# Altium PCB MB.PcbDoc
Units mil, origin at the board's own origin, x right, y up, seen from the top; angles counter-clockwise.
Board outline 4133.86 x 4881.89 mil, 4 copper layers (Digital Layer, nMO Layer, MO Layer, GND Layer), stack 39.843 mil thick; 59 components, 77 nets, 349 pads, 0 vias.
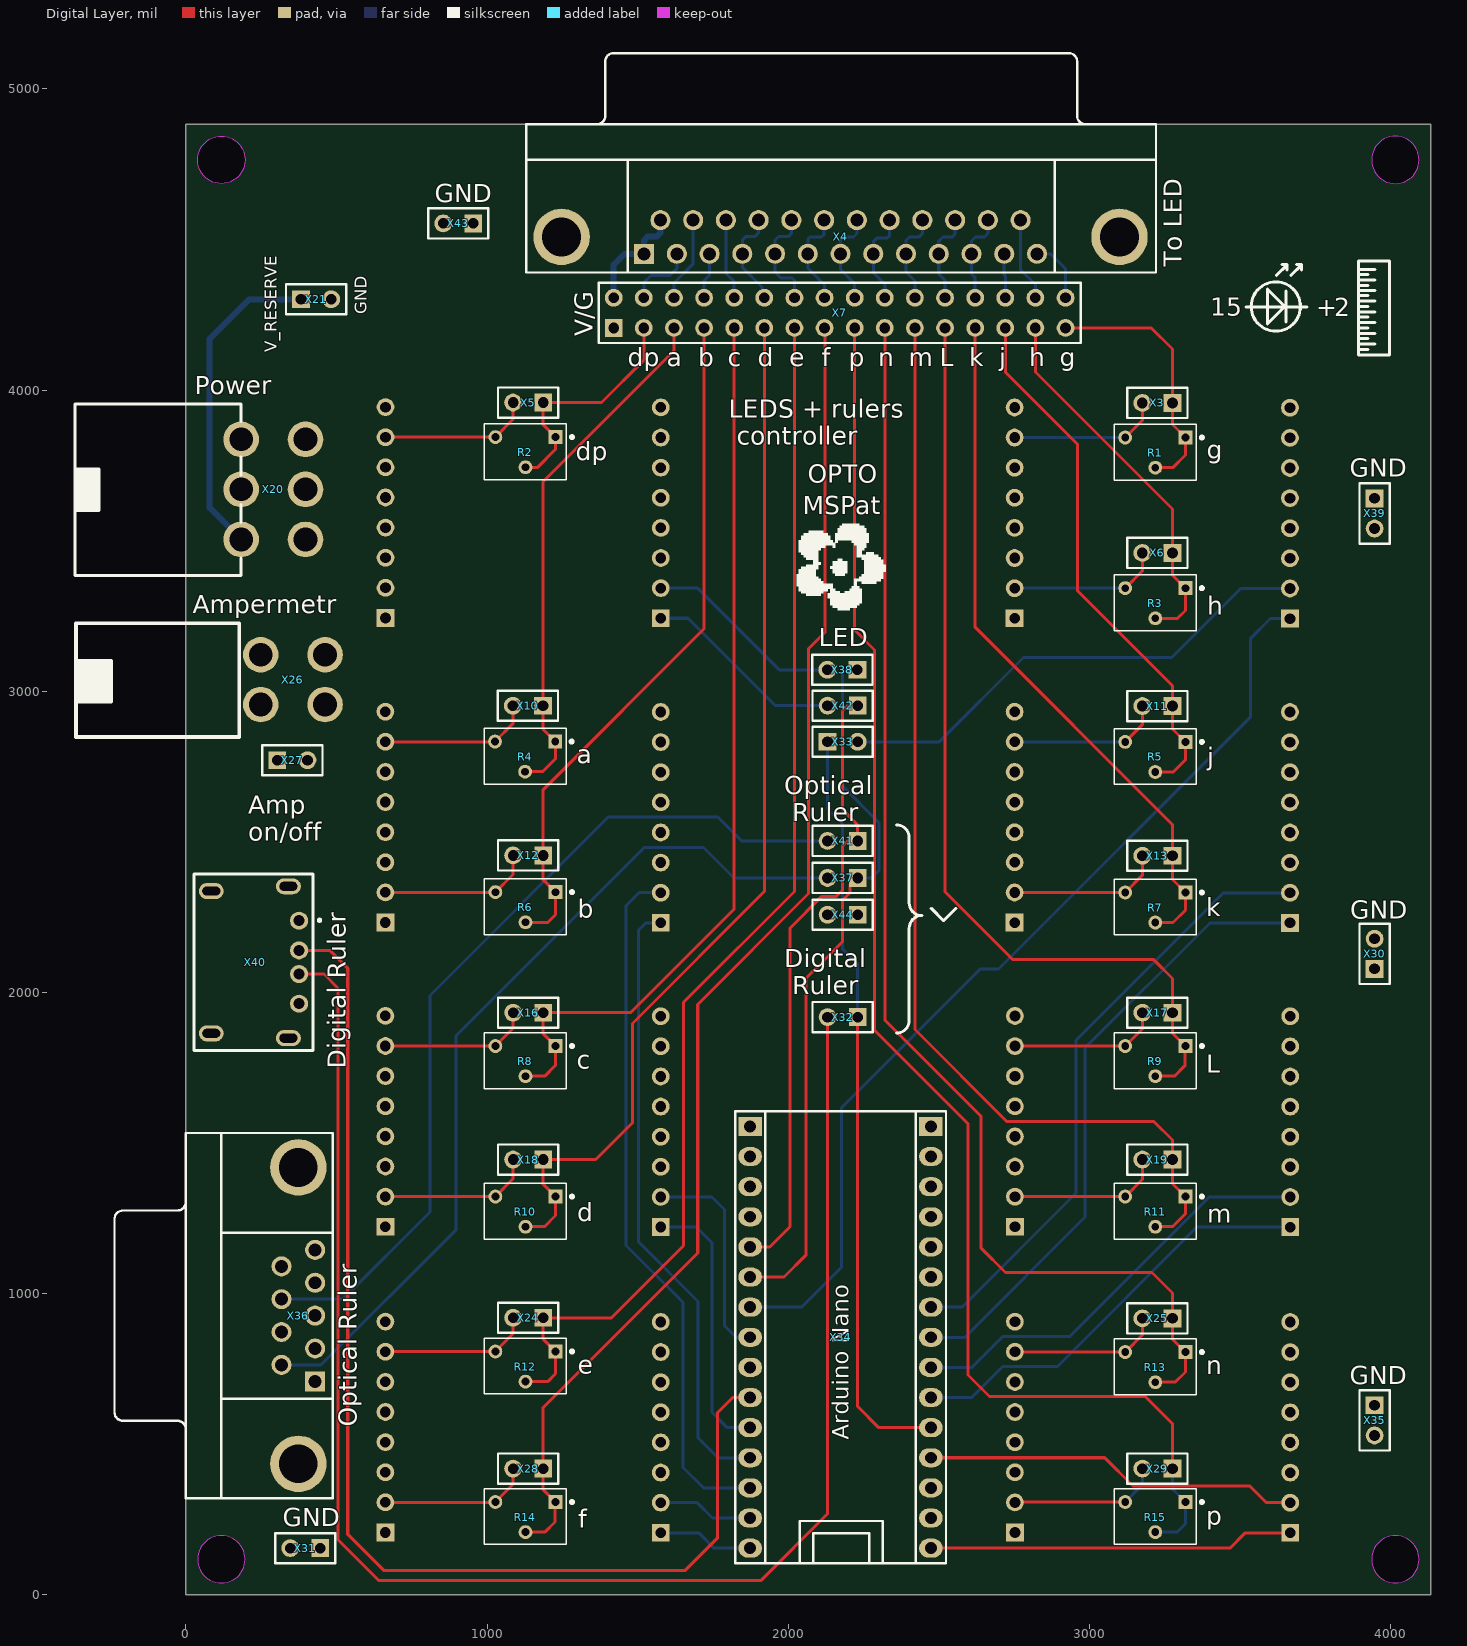
[diagram p0: Digital Layer view]
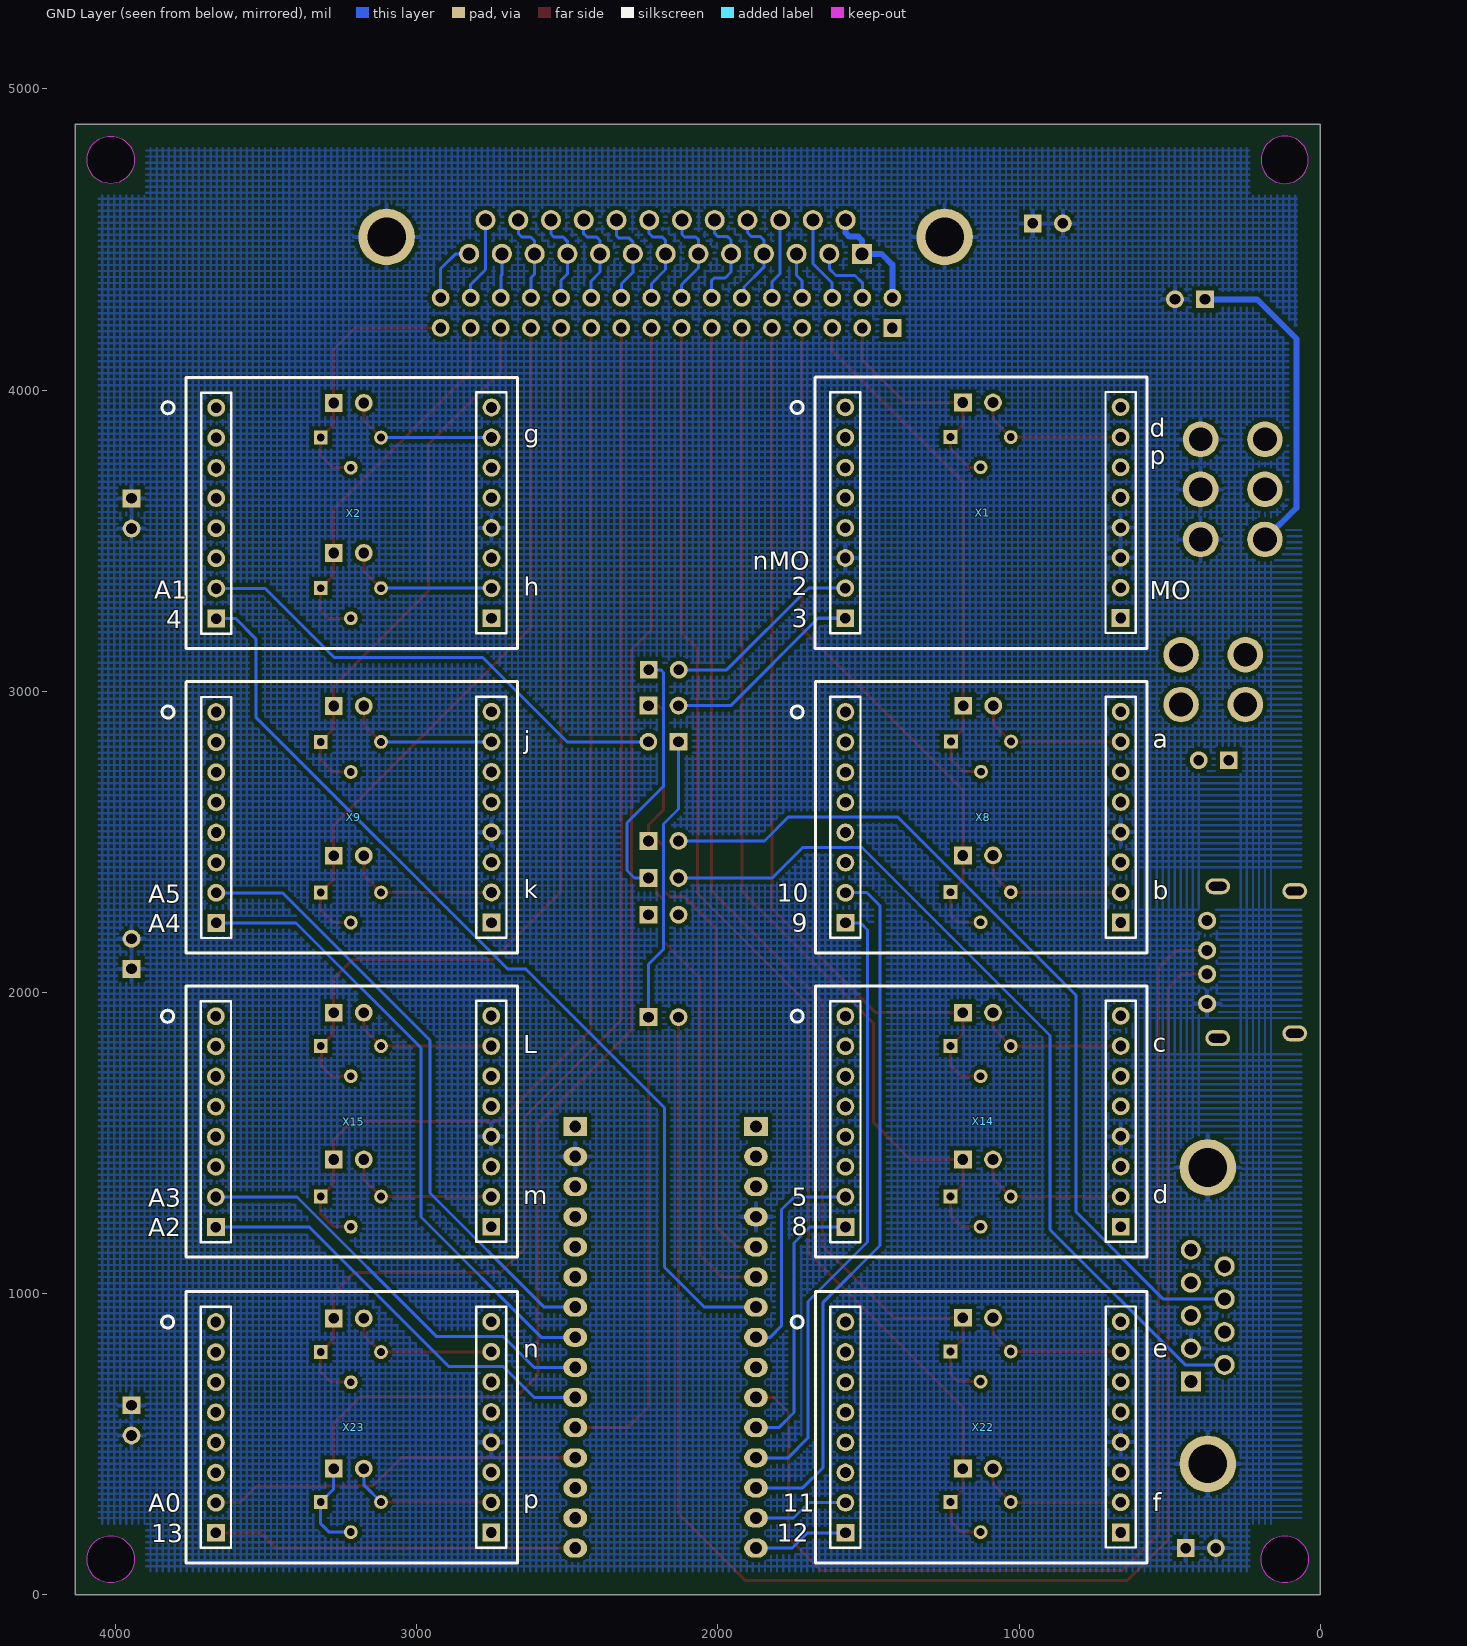
[diagram p1: GND Layer view, seen from below]
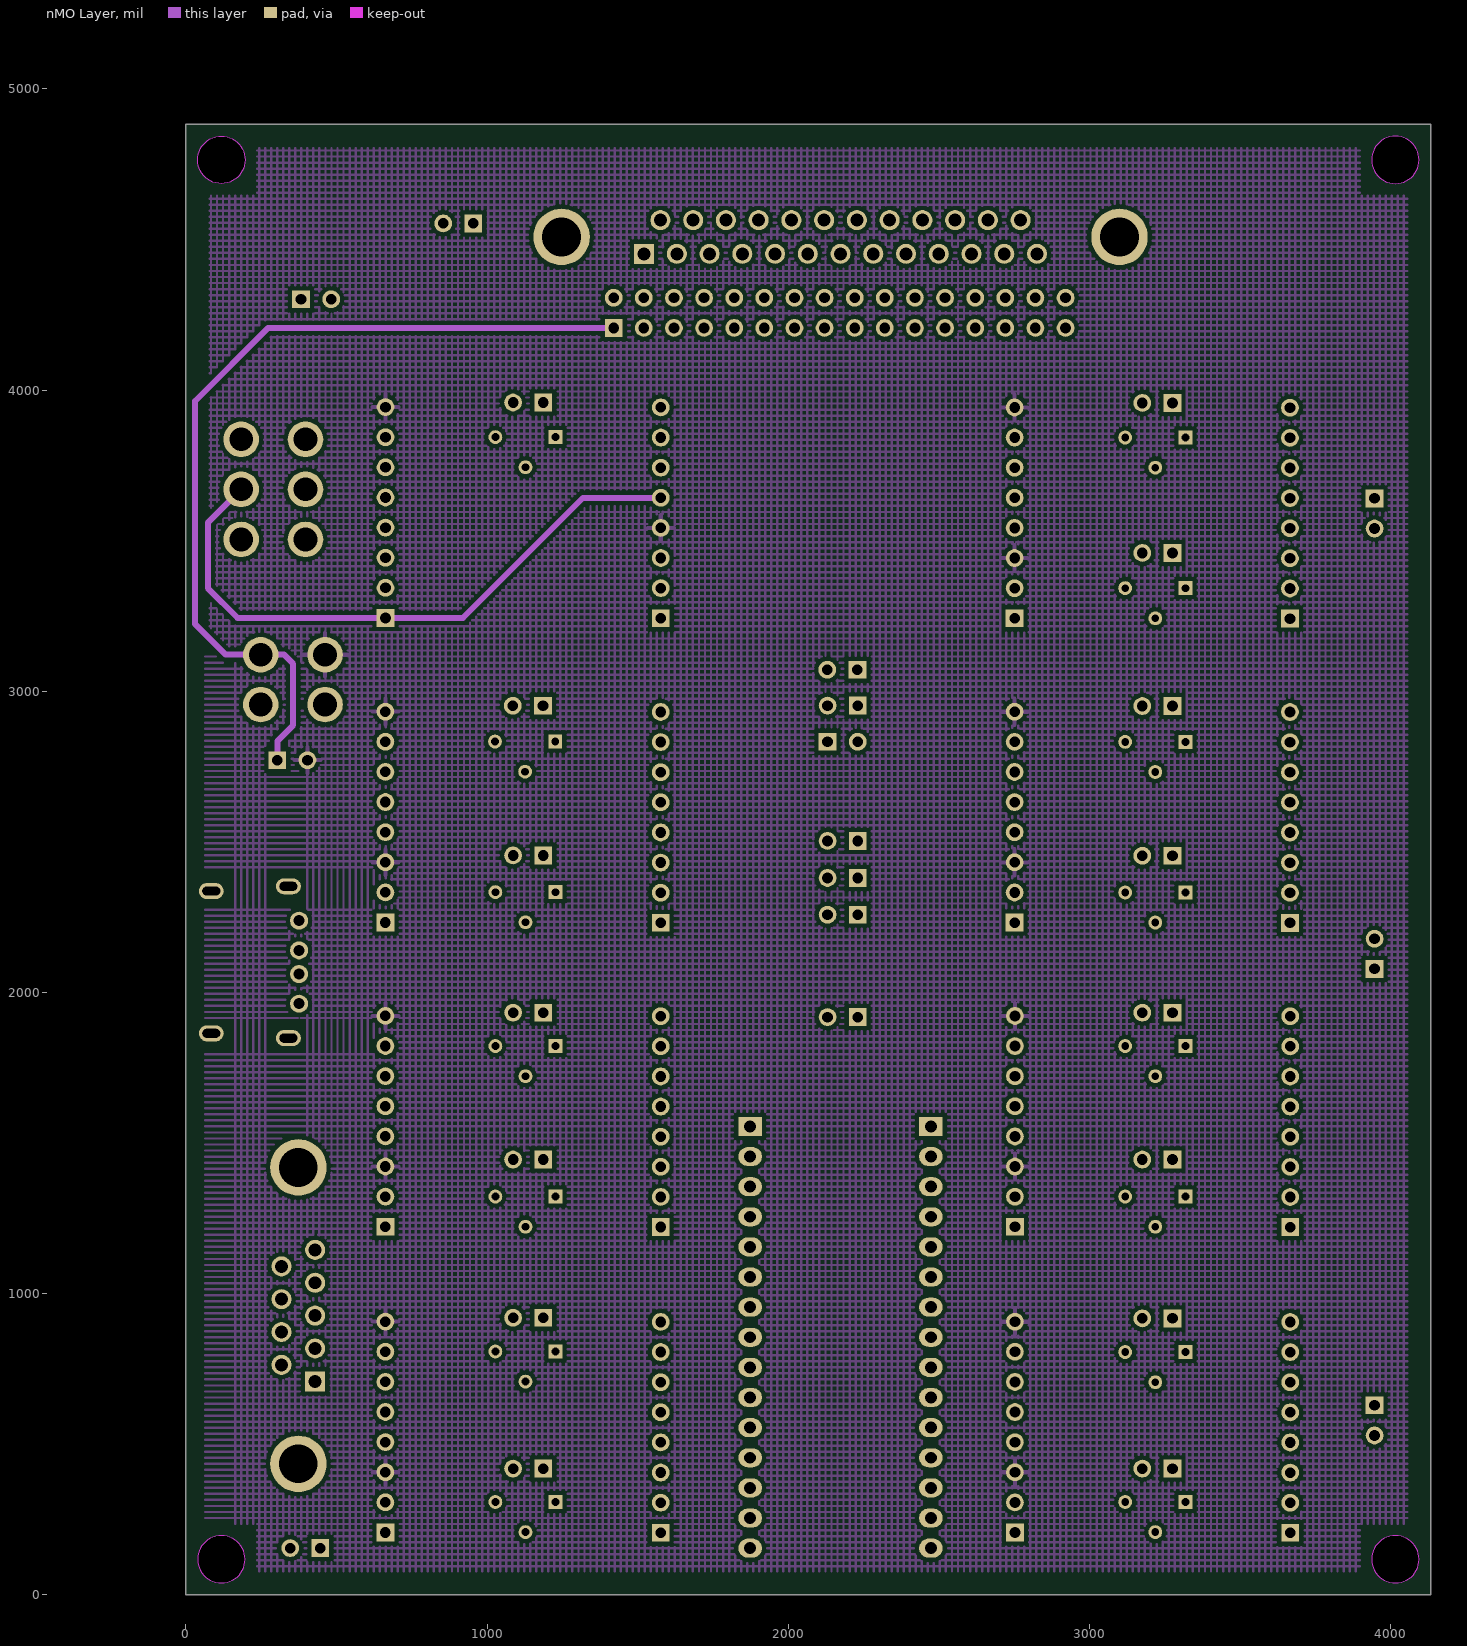
[diagram p2: nMO Layer]
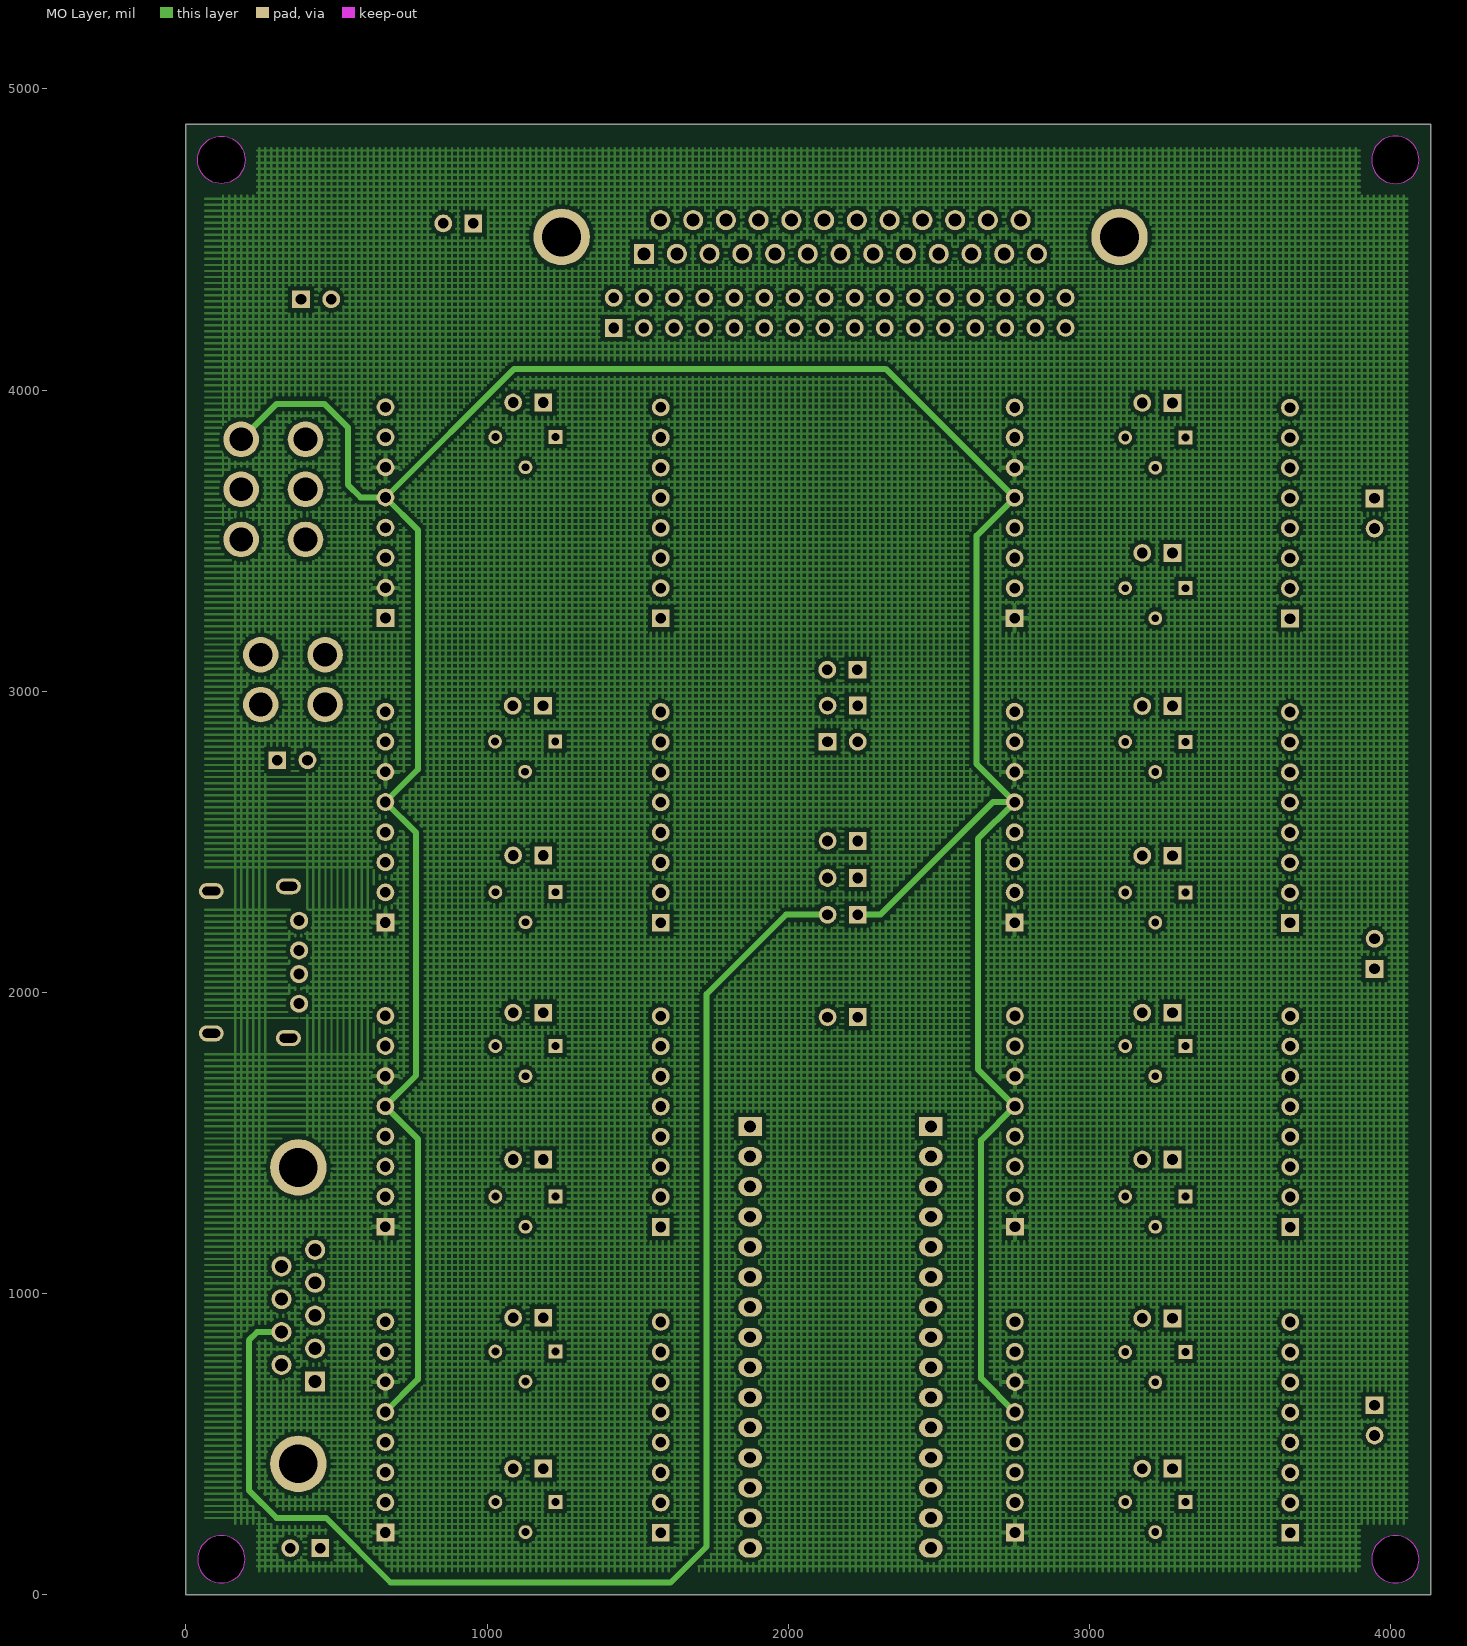
[diagram p3: MO Layer]

## Layer stack, top to bottom
Top Solder: solder mask 1, SM-001, Dk 4
Digital Layer: signal copper 0.7087
Dielectric 1: prepreg 4.5276, FR4 PR, Dk 4.2
nMO Layer: signal copper 0.7087
Dielectric 2: core 27.9528, FR4 Tg150, Dk 4.6
MO Layer: signal copper 0.7087
Dielectric 3: prepreg 4.5276, FR4 PR, Dk 4.2
GND Layer: signal copper 0.7087
Bottom Solder: solder mask 1, SM-001, Dk 4

## Board outline
0,4881.89 4133.86,4881.89 4133.86,0 0,0
cut-out: 3937.01,118.11 ccw(c4015.75,118.11) 4015.75,39.37 ccw(c4015.75,118.11) 4094.49,118.11 ccw(c4015.75,118.11) 4015.75,196.85 ccw(c4015.75,118.11)
cut-out: 3937.01,4763.78 ccw(c4015.75,4763.78) 4015.75,4685.04 ccw(c4015.75,4763.78) 4094.49,4763.78 ccw(c4015.75,4763.78) 4015.75,4842.52 ccw(c4015.75,4763.78)
cut-out: 118.11,4685.04 cw(c118.11,4763.78) 39.37,4763.78 cw(c118.11,4763.78) 118.11,4842.52 cw(c118.11,4763.78) 196.85,4763.78 cw(c118.11,4763.78)
cut-out: 39.37,118.11 ccw(c118.11,118.11) 118.11,39.37 ccw(c118.11,118.11) 196.85,118.11 ccw(c118.11,118.11) 118.11,196.85 ccw(c118.11,118.11)

## Design rules (kind name [scope] priority, off if disabled: settings)
AcuteAngle [All] p1: minimum=3.50000000000000E+0001 checktracksonly=FALSE
BoardOutlineClearance "BoardOutlineClearance 1" [All] p1: gap=9.84 ignorepadtopadclearanceinfootprint=FALSE except(0: Arc-SplitContinuation Track-SplitContinuation SMDPad-SplitContinuation THPad-SplitContinuation Via-SplitContinuation Fill-SplitContinuation Poly-SplitContinuation Region-SplitContinuation Text-SplitContinuation) // Milling
BoardOutlineClearance "BoardOutlineClearance 2" [All] p2: gap=15.75 ignorepadtopadclearanceinfootprint=FALSE except(0: Arc-SplitContinuation Track-SplitContinuation SMDPad-SplitContinuation THPad-SplitContinuation Via-SplitContinuation Fill-SplitContinuation Poly-SplitContinuation Region-SplitContinuation Text-SplitContinuation) // V-Cut
Clearance "Clearance 3 Oz" [All] p1: gap=13.78 ignorepadtopadclearanceinfootprint=FALSE except(9.84: Arc-Hole Track-Hole SMDPad-Hole THPad-Hole Via-Hole Fill-Hole Poly-Hole Region-Hole Text-Hole)
Clearance "Clearance 2 Oz" [All] p2: gap=11.81 ignorepadtopadclearanceinfootprint=FALSE except(9.84: Arc-Hole Track-Hole SMDPad-Hole THPad-Hole Via-Hole Fill-Hole Poly-Hole Region-Hole Text-Hole)
Clearance "Clearance-1 1 Oz" [All] p3: gap=7.87 ignorepadtopadclearanceinfootprint=FALSE except(9.84: Arc-Hole Track-Hole SMDPad-Hole THPad-Hole Via-Hole Fill-Hole Poly-Hole Region-Hole Text-Hole) // Standart
Clearance "Clearance-2 1 Oz" [All] p4: gap=5.91 ignorepadtopadclearanceinfootprint=FALSE except(7.87: Arc-Fill Arc-Poly Track-Fill Track-Poly SMDPad-Fill SMDPad-Poly THPad-Fill THPad-Poly Via-Fill Via-Poly Fill-Fill Fill-Poly Poly-Poly; 9.84: Arc-Hole Track-Hole SMDPad-Hole THPad-Hole Via-Hole Fill-Hole Poly-Hole Region-Hole Text-Hole) // Advance
Clearance "Clearance-1 1/2 Oz" [All] p5: gap=4.92 ignorepadtopadclearanceinfootprint=FALSE except(7.87: Arc-Fill Arc-Poly Track-Fill Track-Poly SMDPad-SMDPad SMDPad-Fill SMDPad-Poly THPad-Fill THPad-Poly Via-Fill Via-Poly Fill-Fill Fill-Poly Poly-Poly Poly-Region Poly-Text; 9.84: Arc-Hole Track-Hole SMDPad-Hole THPad-Hole Via-Hole Fill-Hole Poly-Hole Region-Hole Text-Hole) // Standart
Clearance "Clearance-2 1/2 Oz" [All] p6: gap=3.94 ignorepadtopadclearanceinfootprint=FALSE except(5.91: Arc-Fill Arc-Poly Track-Fill Track-Poly SMDPad-SMDPad SMDPad-Fill SMDPad-Poly THPad-Fill THPad-Poly Via-Fill Via-Poly Fill-Fill Fill-Poly Poly-Poly Poly-Region Poly-Text; 9.84: Arc-Hole Track-Hole SMDPad-Hole THPad-Hole Via-Hole Fill-Hole Poly-Hole Region-Hole Text-Hole) // Advance
DiffPairsRouting "DiffPairsRouting 1 Oz" [All] p1: maxlimit=10 minlimit=7.87 mostfreqgap=10 toplayer_minwidth=7.87 toplayer_maxwidth=15 toplayer_prefwidth=15 midlayer1_minwidth=7.87 midlayer1_maxwidth=15 midlayer1_prefwidth=15 midlayer2_minwidth=7.87 midlayer2_maxwidth=15 midlayer2_prefwidth=15 bottomlayer_minwidth=7.87 bottomlayer_maxwidth=15 bottomlayer_prefwidth=15 maxuncoupledlength=500
DiffPairsRouting "DiffPairsRouting 1/2 Oz" [All] p2: maxlimit=10 minlimit=3.94 mostfreqgap=10 toplayer_minwidth=3.94 toplayer_maxwidth=15 toplayer_prefwidth=15 midlayer1_minwidth=3.94 midlayer1_maxwidth=15 midlayer1_prefwidth=15 midlayer2_minwidth=3.94 midlayer2_maxwidth=15 midlayer2_prefwidth=15 bottomlayer_minwidth=3.94 bottomlayer_maxwidth=15 bottomlayer_prefwidth=15 maxuncoupledlength=500
HoleSize "Minimum HoleSize" [IsPad] p1: absolutevalues=TRUE maxlimit=232.28 minlimit=23.62 maxpercent=80.000 minpercent=20.000
HoleSize "Minimum HoleSize VIA 1" [IsVia] p2: absolutevalues=TRUE maxlimit=232.28 minlimit=11.81 maxpercent=80.000 minpercent=20.000 // Standart
HoleSize "Minimum HoleSize VIA 2" [IsVia] p3: absolutevalues=TRUE maxlimit=232.28 minlimit=7.87 maxpercent=80.000 minpercent=20.000 // Advance
HoleToHoleClearance Hole2HoleClearance [All] p1: gap=9.84 allowstackedmicrovias=FALSE
MinimumAnnularRing "Minimum AR VIA Standart" [IsVia] p1: minimumring=5.91
MinimumAnnularRing "Minimum AR PAD Standart" [IsPAD] p2: minimumring=7.87
MinimumAnnularRing "Minimum AR VIA Advance" [IsVia] p3: minimumring=3.94
MinimumAnnularRing "Minimum AR PAD Advance" [IsPAD] p4: minimumring=5.91
MinimumSolderMaskSliver "SolderMask Bridge Standart" [All] p1: minsoldermaskwidth=5.91 // All Masks
MinimumSolderMaskSliver "SolderMask Bridge Advance" [All] p2: minsoldermaskwidth=3.94 // Mask LDI
PlaneClearance "PlaneClearance 3 Oz" [All] p1: clearance=13.78
PlaneClearance "PlaneClearance 2 Oz" [All] p2: clearance=11.81
PlaneClearance "PlaneClearance 1 Oz" [All] p3: clearance=7.87
PlaneClearance "PlaneClearance-1 1/2 Oz" [All] p4: clearance=7.87 // Standart
PlaneClearance "PlaneClearance-2 1/2 Oz" [All] p5: clearance=5.91 // Advance
PlaneConnect "TermalConnect 3 Oz" [All] p1: planeconnectstyle=Relief reliefexpansion=7.87 reliefentries=4 reliefconductorwidth=13.78 reliefairgap=13.78 // Standart
PlaneConnect "TermalConnect 2 Oz" [All] p2: planeconnectstyle=Relief reliefexpansion=7.87 reliefentries=4 reliefconductorwidth=11.81 reliefairgap=11.81 // Standart
PlaneConnect "TermalConnect-1 1 Oz" [All] p3: planeconnectstyle=Relief reliefexpansion=7.87 reliefentries=4 reliefconductorwidth=7.87 reliefairgap=7.87 // Standart
PlaneConnect "TermalConnect-2 1 Oz" [All] p4: pad.planeconnectstyle=Relief pad.reliefexpansion=5.91 pad.reliefentries=4 pad.reliefconductorwidth=7.87 pad.reliefairgap=7.87 via.planeconnectstyle=Direct via.reliefexpansion=5.91 via.reliefentries=4 via.reliefconductorwidth=5.91 via.reliefairgap=5.91 // Advance
PlaneConnect "TermalConnect-1 1/2 Oz" [All] p5: planeconnectstyle=Relief reliefexpansion=7.87 reliefentries=4 reliefconductorwidth=7.87 reliefairgap=7.87 // Standart
PlaneConnect "TermalConnect-2 1/2 Oz" [All] p6: pad.planeconnectstyle=Relief pad.reliefexpansion=5.91 pad.reliefentries=4 pad.reliefconductorwidth=5.91 pad.reliefairgap=5.91 via.planeconnectstyle=Direct via.reliefexpansion=5.91 via.reliefentries=4 via.reliefconductorwidth=5.91 via.reliefairgap=5.91 // Advance
PolygonConnect "PolygonConnect 3 Oz" [All] p1: thpad.connectstyle=Relief thpad.reliefconductorwidth=13.78 thpad.reliefentries=4 thpad.polygonreliefangle="90 Angle" thpad.airgapwidth=13.78 smdpad.connectstyle=Relief smdpad.reliefconductorwidth=13.78 smdpad.reliefentries=4 smdpad.polygonreliefangle="90 Angle" smdpad.airgapwidth=13.78 via.connectstyle=Direct via.reliefconductorwidth=10 via.reliefentries=4 via.polygonreliefangle="90 Angle" via.airgapwidth=10
PolygonConnect "PolygonConnect 2 Oz" [All] p2: thpad.connectstyle=Relief thpad.reliefconductorwidth=11.81 thpad.reliefentries=4 thpad.polygonreliefangle="90 Angle" thpad.airgapwidth=11.81 smdpad.connectstyle=Relief smdpad.reliefconductorwidth=11.81 smdpad.reliefentries=4 smdpad.polygonreliefangle="90 Angle" smdpad.airgapwidth=11.81 via.connectstyle=Direct via.reliefconductorwidth=10 via.reliefentries=4 via.polygonreliefangle="90 Angle" via.airgapwidth=10
PolygonConnect "PolygonConnect-1 1 Oz" [All] p3: thpad.connectstyle=Relief thpad.reliefconductorwidth=7.87 thpad.reliefentries=4 thpad.polygonreliefangle="90 Angle" thpad.airgapwidth=7.87 smdpad.connectstyle=Relief smdpad.reliefconductorwidth=7.87 smdpad.reliefentries=4 smdpad.polygonreliefangle="90 Angle" smdpad.airgapwidth=7.87 via.connectstyle=Direct via.reliefconductorwidth=10 via.reliefentries=4 via.polygonreliefangle="90 Angle" via.airgapwidth=10 // Standart
PolygonConnect "PolygonConnect-2 1 Oz" [All] p4: thpad.connectstyle=Relief thpad.reliefconductorwidth=5.91 thpad.reliefentries=4 thpad.polygonreliefangle="90 Angle" thpad.airgapwidth=5.91 smdpad.connectstyle=Relief smdpad.reliefconductorwidth=5.91 smdpad.reliefentries=4 smdpad.polygonreliefangle="90 Angle" smdpad.airgapwidth=5.91 via.connectstyle=Direct via.reliefconductorwidth=10 via.reliefentries=4 via.polygonreliefangle="90 Angle" via.airgapwidth=10 // Advance
PolygonConnect "PolygonConnect-1 1/2 Oz" [All] p5: thpad.connectstyle=Relief thpad.reliefconductorwidth=5.91 thpad.reliefentries=4 thpad.polygonreliefangle="90 Angle" thpad.airgapwidth=7.87 smdpad.connectstyle=Relief smdpad.reliefconductorwidth=7.87 smdpad.reliefentries=4 smdpad.polygonreliefangle="90 Angle" smdpad.airgapwidth=7.87 via.connectstyle=Direct via.reliefconductorwidth=10 via.reliefentries=4 via.polygonreliefangle="90 Angle" via.airgapwidth=10 // Standart
PolygonConnect "PolygonConnect-2 1/2 Oz" [All] p6: thpad.connectstyle=Relief thpad.reliefconductorwidth=4.92 thpad.reliefentries=4 thpad.polygonreliefangle="90 Angle" thpad.airgapwidth=5.91 smdpad.connectstyle=Relief smdpad.reliefconductorwidth=4.92 smdpad.reliefentries=4 smdpad.polygonreliefangle="90 Angle" smdpad.airgapwidth=5.91 via.connectstyle=Direct via.reliefconductorwidth=10 via.reliefentries=4 via.polygonreliefangle="90 Angle" via.airgapwidth=10 // Advance
RoutingCorners [All] p1 off: cornerstyle=45-Degree minsetback=100 maxsetback=100
RoutingVias [All] p1: holewidth=11.81 width=23.62 viastyle="Through Hole" minholewidth=7.87 minwidth=15.75 maxholewidth=232.28 maxwidth=251.97
SilkToSilkClearance Silk2SilkClearance [All] p1 off: silktosilkclearance=5.91
SilkToSolderMaskClearance Silk2SolderMaskClearance [IsPad] p1 off: minsilkscreentomaskgap=5.91 clearancetoexposedcopper=TRUE
SolderMaskExpansion SolderMaskExpansion-1 [All] p1: expansion=1.97 // Standart
SolderMaskExpansion "SolderMaskExpansion LDI" [All] p2: expansion=0.98 // Advance
UnRoutedNet [All] p1: checkbadconnections=TRUE
Width "Width 3 Oz" [All] p1: maxlimit=20 minlimit=10 preferedwidth=10 checkconnectedcopper=TRUE
Width "Width 2 Oz" [All] p2: maxlimit=393.7 minlimit=10 preferedwidth=10 minimp=50.000000 maximp=50.000000 favimp=50.000000 checkconnectedcopper=TRUE
Width "Width 1 Oz" [All] p3: maxlimit=20 minlimit=10 preferedwidth=10 checkconnectedcopper=TRUE
Width "Width 1/2 Oz" [All] p4: maxlimit=20 minlimit=10 preferedwidth=10 checkconnectedcopper=TRUE
20 further rules are at their usual default settings.

## Components (designator, comment, footprint, x,y, rotation, side; value= is the part's Value field where it differs from the comment)
R1 "RES 3266W" "RES 3266W" 3318.62,3842.12 r180 top
R2 "RES 3266W" "RES 3266W" 1227.62,3843.49 r180 top
R3 "RES 3266W" "RES 3266W" 3318.62,3342.12 r180 top
R4 "RES 3266W" "RES 3266W" 1226.62,2832.87 r180 top
R5 "RES 3266W" "RES 3266W" 3318.62,2831.87 r180 top
R6 "RES 3266W" "RES 3266W" 1227.62,2332.87 r180 top
R7 "RES 3266W" "RES 3266W" 3318.62,2331.87 r180 top
R8 "RES 3266W" "RES 3266W" 1227.62,1821.87 r180 top
R9 "RES 3266W" "RES 3266W" 3318.62,1821.87 r180 top
R10 "RES 3266W" "RES 3266W" 1227.62,1322.12 r180 top
R11 "RES 3266W" "RES 3266W" 3318.62,1322.12 r180 top
R12 "RES 3266W" "RES 3266W" 1227.62,807.87 r180 top
R13 "RES 3266W" "RES 3266W" 3318.62,805.87 r180 top
R14 "RES 3266W" "RES 3266W" 1227.62,308.12 r180 top
R15 "RES 3266W" "RES 3266W" 3318.62,308.12 r180 top
X1 "MEZ_RELAY" MEZ_RELAY 1576.98,3942.23 r180 bottom
X2 "MEZ_RELAY" MEZ_RELAY 3665.62,3941.12 r180 bottom
X3 "GND" HDR1X2 3275.62,3957.12 r180 top
X4 "D Connector 25" DSUB1.385-2H25A 2173.62,4882.12 r0 top
X5 "GND" HDR1X2 1186.62,3958.49 r180 top
X6 "GND" HDR1X2 3275.62,3459.12 r180 top
X7 "Header 16X2" HDR2X16 1420.62,4206.12 r0 top
X8 "MEZ_RELAY" MEZ_RELAY 1576.62,2931.12 r180 bottom
X9 "MEZ_RELAY" MEZ_RELAY 3665.62,2930.87 r180 bottom
X10 "Header 2" HDR1X2 1185.62,2951.87 r180 top
X11 "Header 2" HDR1X2 3275.62,2950.87 r180 top
X12 "Header 2" HDR1X2 1186.62,2454.87 r180 top
X13 "Header 2" HDR1X2 3275.62,2453.87 r180 top
X14 "MEZ_RELAY" MEZ_RELAY 1576.62,1921.12 r180 bottom
X15 "MEZ_RELAY" MEZ_RELAY 3666.62,1920.87 r180 bottom
X16 "Header 2" HDR1X2 1186.62,1932.87 r180 top
X17 "GND" HDR1X2 3275.62,1932.87 r180 top
X18 "Header 2" HDR1X2 1186.62,1445.12 r180 top
X19 "GND" HDR1X2 3275.62,1445.12 r180 top
X20 "Power" POWER 183.8,3836.12 r90 top
X21 "Header 2" HDR1X2 382.62,4301.12 r0 top
X22 "MEZ_RELAY" MEZ_RELAY 1576.62,906.12 r180 bottom
X23 "MEZ_RELAY" MEZ_RELAY 3666.62,905.87 r180 bottom
X24 "GND" HDR1X2 1186.62,919.87 r180 top
X25 "GND" HDR1X2 3275.62,917.87 r180 top
X26 "Ampermetr" AMP_VOLTMETER 462.31,3121.12 r270 top
X27 "Header 2" HDR1X2 303.8,2771.12 r0 top
X28 "GND" HDR1X2 1186.62,419.12 r180 top
X29 "GND" HDR1X2 3275.62,419.12 r180 top
X30 "GND" HDR1X2 3946.62,2078.12 r90 top
X31 "GND" HDR1X2 446.62,155.12 r180 top
X32 "Digit_rul" HDR1X2 2230.62,1918.12 r180 top
X33 "Relay" HDR1X2 2130.62,2832.12 r0 top
X34 "Arduino Nano" PCBComponent_1 2473.62,1555.12 r90 top
X35 "GND" HDR1X2 3946.62,629.12 r270 top
X36 "D Connector 9" DSUB1.385-2H9 -0.39,927.05 r90 top
X37 "Optic_rul" HDR1X2 2230.62,2380.12 r180 top
X38 "Relay" HDR1X2 2229.62,3071.12 r180 top
X39 "GND" HDR1X2 3946.62,3640.12 r270 top
X40 "USB" USB 376,2238.17 r270 top
X41 "Optic_ruler" HDR1X2 2230.62,2502.98 r180 top
X42 "Relay" HDR1X2 2230.62,2952.12 r180 top
X43 "GND" HDR1X2 954.62,4553.12 r180 top
X44 "Optic_rul" HDR1X2 2230.62,2258.12 r180 top

## Footprints (in the part's own frame and the unit in brackets; to place one, negate y for a bottom-side part, rotate by r counter-clockwise, add the part's x,y. Pads: shape width x height; smd on the part's side, far side on the other; paste and mask are expansions set on the pad)
AMP_VOLTMETER [mm] "AMP_VOLTMETER"
  round 3 hole 2: 1(0,0) 2(0,-5.423) 3(4.2,-5.423) 4(4.2,0)
  silkscreen extent -2.66,-21 6.94,-7.25
DSUB1.385-2H9 [mm] "Connector; D Subminiature; 9 Position; Right Angle; Pitch 1.385 mm"
  rect 1.69x1.69 hole 1.09: 1(-5.54,-10.92)
  round 1.69 hole 1.09: 2(-2.77,-10.92) 3(0,-10.92) 4(2.77,-10.92) 5(5.54,-10.92) 6(-4.155,-8.08) 8(1.385,-8.08) 9(4.155,-8.08)
  round 1.69 hole 1.09 mask+0.102: 7(-1.385,-8.08)
  round 4.76 hole 3.26: 10(-12.495,-9.5) 11(12.495,-9.5)
  silkscreen extent -15.4,-12.4 15.4,6
DSUB1.385-2H25A [mm] "Connector; D Subminiature; 25 Position; Right Angle; Pitch 1.385 mm"
  rect 1.69x1.69 hole 1.09: 1(-16.566,-10.92)
  round 1.69 hole 1.09: 2(-13.805,-10.92) 3(-11.044,-10.92) 4(-8.283,-10.92) 5(-5.522,-10.92) 6(-2.761,-10.92) 7(0,-10.92) 8(2.761,-10.92) 9(5.522,-10.92) 10(8.283,-10.92) 11(11.044,-10.92) 12(13.805,-10.92) 13(16.566,-10.92) 14(-15.185,-8.08) 15(-12.424,-8.08) 16(-9.663,-8.08) 17(-6.902,-8.08) 18(-4.141,-8.08) 19(-1.38,-8.08) 20(1.381,-8.08) 21(4.142,-8.08) 22(6.903,-8.08) 23(9.664,-8.08) 24(12.425,-8.08) 25(15.186,-8.08)
  round 4.76 hole 3.26: 26(-23.526,-9.5) 27(23.526,-9.5)
  silkscreen extent -26.5,-12.5 26.6,6
HDR1X2 [mm] "Connector; Header; 2 Position"
  rect 1.5x1.5 hole 0.9: 1(0,0)
  round 1.5 hole 0.9: 2(2.54,0)
  silkscreen extent -1.27,-1.27 3.81,1.27
HDR2X16 [mm] "Connector; Header; 16x2 Position"
  rect 1.5x1.5 hole 0.9: 1(0,0)
  round 1.5 hole 0.9: 2(0,2.54) 3(2.54,0) 4(2.54,2.54) 5(5.08,0) 6(5.08,2.54) 7(7.62,0) 8(7.62,2.54) 9(10.16,0) 10(10.16,2.54) 11(12.7,0) 12(12.7,2.54) 13(15.24,0) 14(15.24,2.54) 15(17.78,0) 16(17.78,2.54) 17(20.32,0) 18(20.32,2.54) 19(22.86,0) 20(22.86,2.54) 21(25.4,0) 22(25.4,2.54) 23(27.94,0) 24(27.94,2.54) 25(30.48,0) 26(30.48,2.54) 27(33.02,0) 28(33.02,2.54) 29(35.56,0) 30(35.56,2.54) 31(38.1,0) 32(38.1,2.54)
  silkscreen extent -1.27,-1.27 39.37,3.81
MEZ_RELAY [mm] "мезонин реле"
  round 1.5 hole 0.9: 1(0,0) 2(0,-2.54) 3(0,-5.08) 4(0,-7.62) 5(0,-10.16) 6(0,-12.7) 7(0,-15.24) 10(23.216,-15.215) 11(23.216,-12.675) 12(23.216,-10.135) 14(23.216,-5.055) 15(23.216,-2.515) 16(23.216,0.025)
  rect 1.5x1.5 hole 0.9: 8(0,-17.78) 9(23.216,-17.755)
  round 1.5 hole 0.9 mask+0.102: 13(23.216,-7.595)
  silkscreen extent -4.57,-20.32 25.43,2.57
PCBComponent_1 [mm]
  rect 1.6x2 hole 1: 1(0,15.24) 30(0,0)
  oval 1.6x2 hole 1: 2(-2.54,15.24) 3(-5.08,15.24) 4(-7.62,15.24) 5(-10.16,15.24) 6(-12.7,15.24) 7(-15.24,15.24) 8(-17.78,15.24) 9(-20.32,15.24) 10(-22.86,15.24) 11(-25.4,15.24) 12(-27.94,15.24) 13(-30.48,15.24) 14(-33.02,15.24) 15(-35.56,15.24) 16(-35.56,0) 17(-33.02,0) 18(-30.48,0) 19(-27.94,0) 20(-25.4,0) 21(-22.86,0) 22(-20.32,0) 23(-17.78,0) 24(-15.24,0) 25(-12.7,0) 26(-10.16,0) 27(-7.62,0) 28(-5.08,0) 29(-2.54,0)
  silkscreen extent -36.83,-1.27 1.27,16.51
POWER [mm] "POWER"
  round 3 hole 2 mask+0.102: 1(0,0)
  round 3 hole 2: 2(-4.217,0) 3(-8.435,0) 4(0,-5.422) 5(-4.217,-5.422) 6(-8.435,-5.422)
  silkscreen extent -11.5,0 3,14
"RES 3266W" [mm]
  rect 1.168x1.168 hole 0.66: 1(0,0)
  round 1.168 hole 0.66: 2(2.54,2.54) 3(5.08,0)
  silkscreen extent -1.49,-1.12 5.99,3.58
USB [mm]
  round 1.52 hole 0.92: 1(0,0) 2(2.5,0) 3(4.5,0) 4(7,0)
  oval 1.35x2.1 hole 1.5 slot 0.75 at 0 deg: 5(-2.9,-0.9) 6(-2.5,-7.4) 7(9.5,-7.4) 8(9.9,-0.9)
  silkscreen extent -3.94,-8.87 10.94,1.83

## Part data
X3 X5 X6 X17 X19 X24 X25 X28 X29 X30 X31 X32 X33 X35 X37 X38 X39 X41 X42 X43 X44: library part "Header 2", "Header, 2-Pin", LatestRevisionDate=17-Jul-2002, LatestRevisionNote="Re-released for DXP Platform.", Publisher="Altium Limited"
X4: "Receptacle Assembly, 25 Position, Right Angle", PackageDocument=U, DatasheetDocument=19-Mar-1999, Gender=Receptacle, LatestRevisionDate=17-Jul-2002, LatestRevisionNote="Re-released for DXP Platform.", Orientation="Right Angle", PackageReference=787202, Positions=25, Published=15-Jun-2001, Publisher="Altium Limited"
X7: "Header, 16-Pin, Dual row", LatestRevisionDate=17-Jul-2002, LatestRevisionNote="Re-released for DXP Platform.", Publisher="Altium Limited"
X10 X11 X12 X13 X16 X18 X21 X27: "Header, 2-Pin", LatestRevisionDate=17-Jul-2002, LatestRevisionNote="Re-released for DXP Platform.", Publisher="Altium Limited"
X20: library part POWER
X26: library part AMP_VOLTMETR
X34: library part Component_1
X36: "Receptacle Assembly, 9 Position, Right Angle", PackageDocument=O, DatasheetDocument=1-Sep-1999, Gender=Receptacle, LatestRevisionDate=17-Jul-2002, LatestRevisionNote="Re-released for DXP Platform.", Orientation="Right Angle", PackageReference=788750, Positions=9, Published=15-Jun-2001, Publisher="Altium Limited"

## Nets (pads, with @x,y where several pads share a name; then routed paths per layer and width w, separated by ;. In a path a pad name is that pad's centre, name@x,y a point inside that pad or via, vN(x,y) a via of type N, cw(c..) or ccw(c..) an arc to the next point about the centre after c; other vN are vias at no path point)
\M\O\: X1.5 X1.16 X2.11 X2.16 X8.11 X8.16 X9.11 X9.16 X14.11 X14.16 X15.11 X15.16 X22.11 X22.16 X23.11 X23.16 X26.1 X27.2
\M\O\_00: X4.1 X4.14 X7.2 | length 377.6
  GND Layer w20: X7.2 1420.62,4416.12 1456.7,4452.2 X4.1 1521.42,4496.91 1533.62,4509.12 1563.62,4509.12 1575.77,4521.26 X4.14
\M\O\_0: X7.1 X26.2 X27.1 | length 2952.9
  nMO Layer w20: X27.1 303.8,2834.3 356.62,2887.12 356.62,3091.12 326.62,3121.12 X26.2 132.62,3121.12 31,3222.74 31,3963.5 273.62,4206.12 X7.1
a: R4.3 X8.15 X10.2 | length 507.4
  Digital Layer w10: X8.15 R4.3@1026.62,2832.12 ; R4.3 1085.62,2891.87 X10.2
A0: X23.7 X34.19 | length 1254.9
  Digital Layer w10: X34.19 2473.68,455.17 3050.57,455.17 3144.62,361.12 3532.62,361.12 3587.87,305.87 X23.7
A1: X32.1 X33.1 X34.20 | length 2520.4
  Digital Layer w10: X32.1 2230.62,625.12 2300.62,555.12 X34.20
  GND Layer w10: X33.1 2130.62,2609.12 2180.62,2559.12 2180.62,2143.12 2230.62,2093.12 X32.1
A1_relay: X2.7 X33.2 | length 1645.8
  GND Layer w10: X33.2 2501.12,2832.12 2781,3112 3273.5,3112 3502.62,3341.12 X2.7
A1_ruler: X32.2 X40.3 | length 5402.3
  Digital Layer w10: X40.3 458.74,2061 505.62,2014.12 505.62,183.12 641.62,47.12 1908.62,47.12 2130.62,269.12 X32.2
A2: X15.8 X34.21 | length 1427.3
  GND Layer w10: X34.21 2609.62,655.12 2712.62,758.12 2893.62,758.12 3356.37,1220.87 X15.8
A3: X15.7 X34.22 | length 1427.3
  GND Layer w10: X34.22 2609.62,755.12 2711.62,857.12 2933.62,857.12 3397.37,1320.87 X15.7
A4: X9.8 X34.23 | length 2091.1
  GND Layer w10: X34.23 2586.62,855.12 2985.62,1254.12 2985.62,1816.12 3400.37,2230.87 X9.8
A5: X9.7 X34.24 | length 2058.8
  GND Layer w10: X34.24 2576.62,955.12 2955.62,1334.12 2955.62,1841.12 3445.37,2330.87 X9.7
a_00: X4.15 X7.6 | length 284.3
  GND Layer w10: X7.6 1620.62,4355.12 1684.47,4418.96 X4.15
a_0: R4.1 R4.2 X7.5 X10.1 | length 1745.7
  Digital Layer w10: R4.2 1184.37,2732.87 1226.62,2775.12 R4.1 1185.62,2873.87 X10.1 1185.62,3695.12 1620.62,4130.12 X7.5
b: R6.3 X8.10 X12.2 | length 511.4
  Digital Layer w10: X8.10 R6.3@1027.62,2332.12 ; R6.3 1086.62,2391.87 X12.2
b_00: X4.3 X7.8 | length 153.6
  GND Layer w10: X7.8 1720.62,4363.12 1738.82,4381.32 X4.3
b_0: R6.1 R6.2 X7.7 X12.1 | length 2296.6
  Digital Layer w10: R6.2 1202.37,2232.87 1227.62,2258.12 R6.1 1186.62,2373.87 X12.1 1186.62,2673.12 1720.62,3207.12 X7.7
c: R8.3 X14.15 X16.2 | length 500.4
  Digital Layer w10: X14.15 R8.3@1027.62,1822.12 ; R8.3 1086.62,1880.87 X16.2
c_00: X4.16 X7.10 | length 269.3
  GND Layer w10: X4.16 1793.17,4386.57 1820.62,4359.12 X7.10
c_0: R8.1 R8.2 X7.9 X16.1 | length 3012.3
  Digital Layer w10: R8.2 1191.37,1721.87 1227.62,1758.12 R8.1 1186.62,1862.87 X16.1 1476.37,1932.87 1820.62,2277.12 X7.9
d: R10.3 X14.10 X18.2 | length 512.4
  Digital Layer w10: X14.10 R10.3 1086.62,1381.12 X18.2
D2: X34.5 X41.1 X42.1 | length 2090.4
  Digital Layer w10: X34.5 1938.62,1155.12 2005.62,1222.12 2005.62,2213.12 2111.62,2319.12 2159.62,2319.12 2180.62,2340.12 2180.62,2486.12 2197.48,2502.98 X41.1 2230.62,2556.12 2180.62,2606.12 2180.62,2936.12 2195.62,2951.12 X42.1@2229.62,2951.12
D2_relay: X1.8 X42.2 | length 673.8
  GND Layer w10: X1.8 1667.51,3242.23 1957.62,2952.12 X42.2
D2_ruler: X36.8 X41.2 | length 2929.8
  GND Layer w10: X36.8 521.08,981.57 810.62,1271.12 810.62,1990.12 1402.62,2582.12 1766.34,2582.12 1845.48,2502.98 X41.2
D3: X34.6 X37.1 X38.1 | length 2379.7
  Digital Layer w10: X34.6 1985.62,1055.12 2059.62,1129.12 2059.62,2048.12 2180.62,2169.12 2180.62,2306.49 2204.4,2330.27 2204.4,2353.9 X37.1
  GND Layer w10: X38.1 2189.62,3071.12 2180.62,3062.12 2180.62,2684.12 2301.62,2563.12 2301.62,2405.12 2276.62,2380.12 X37.1
D3_relay: X1.7 X38.2 | length 664.9
  GND Layer w10: X1.7 1699.51,3342.23 1970.62,3071.12 X38.2
D3_ruler: X36.6 X37.2 | length 2943.8
  GND Layer w10: X36.6 448.61,763.46 897.62,1212.48 897.62,1857.12 1521.62,2481.12 1718.62,2481.12 1819.62,2380.12 X37.2
D4: X2.8 X34.7 | length 3201.1
  GND Layer w10: X34.7 2044.12,955.12 2177,1088 2177,1617.12 2637.88,2078 2698,2078 3534,2914 3534,3174 3601.12,3241.12 X2.8
D5: X14.7 X34.8 | length 716.1
  GND Layer w10: X14.7 1746.62,1321.12 1788.62,1279.12 1788.62,893.12 1826.62,855.12 X34.8
D7: X34.10 X40.2 | length 3933.3
  Digital Layer w10: X40.2 478,2139.74 537.62,2080.12 537.62,201.12 658.62,80.12 1656.62,80.12 1765.62,189.12 1765.62,605.12 1815.62,655.12 X34.10
D8: X14.8 X34.11 | length 902.7
  GND Layer w10: X14.8 1694.62,1221.12 1747.62,1168.12 1747.62,605.12 1797.62,555.12 X34.11
D9: X8.8 X34.12 | length 2050.9
  GND Layer w10: X8.8 1527.62,2231.12 1503.62,2207.12 1503.62,1171.12 1700.62,974.12 1700.62,521.12 1766.62,455.12 X34.12
D10: X8.7 X34.13 | length 2327.3
  GND Layer w10: X8.7 1504.62,2331.12 1461.62,2288.12 1461.62,1160.12 1650.62,971.12 1650.62,423.12 1718.62,355.12 X34.13
D11: X22.7 X34.14 | length 318.1
  GND Layer w10: X22.7 1697.62,306.12 1748.62,255.12 X34.14
D12: X22.8 X34.15 | length 318.1
  GND Layer w10: X22.8 1702.62,206.12 1753.62,155.12 X34.15
D13: X23.8 X34.16 | length 1214
  Digital Layer w10: X34.16 3466.62,155.12 3517.37,205.87 X23.8
d_00: X4.4 X4.17 X7.12 | length 328.3
  GND Layer w10: X4.17 1901.87,4522.37 1888.62,4509.12 1858.62,4509.12 1847.52,4498.02 1847.52,4407.22 1913.14,4341.6 1913.14,4313.6 X7.12
d_0: R10.1 R10.2 X7.11 X18.1 | length 3485.3
  Digital Layer w10: R10.2 1190.62,1222.12 1227.62,1259.12 R10.1 1186.62,1363.12 X18.1 1360.62,1445.12 1482.62,1567.12 1482.62,1897.12 1920.62,2335.12 X7.11
dp: R2.3 X1.15 X5.2 | length 504.1
  Digital Layer w10: X1.15 R2.3@1027.62,3843.23 ; R2.3 1086.62,3902.49 X5.2
dp_00: X4.2 X7.4 | length 228.3
  GND Layer w10: X7.4 1520.62,4356.12 1544.62,4380.12 1607.62,4380.12 1630.12,4402.61 X4.2
dp_0: R2.1 R2.2 X5.1 X7.3 | length 796.3
  Digital Layer w10: R2.2 1167.99,3743.49 1227.62,3803.12 R2.1 1186.62,3884.49 X5.1 1379.99,3958.49 1520.62,4099.12 X7.3
e: R12.3 X22.15 X24.2 | length 501.4
  Digital Layer w10: X22.15 R12.3@1027.62,807.12 ; R12.3 1086.62,866.87 X24.2
e_00: X4.5 X4.18 X7.14 | length 347.5
  GND Layer w10: X4.18 2010.57,4520.07 1999.62,4509.12 1967.62,4509.12 1956.22,4497.72 1956.22,4391.52 1975.62,4372.12 2012.62,4372.12 2020.62,4364.12 X7.14
e_0: R12.1 R12.2 X7.13 X24.1 | length 4078.1
  Digital Layer w10: R12.2 1201.37,707.87 1227.62,734.12 R12.1 1186.62,848.87 X24.1 1413.37,919.87 1652.62,1159.12 1652.62,1967.12 2020.62,2335.12 X7.13
f: R14.3 X22.10 X28.2 | length 500.4
  Digital Layer w10: X22.10 R14.3@1027.62,307.12 ; R14.3 1086.62,367.12 X28.2
f_00: X4.6 X4.19 X7.16 | length 325.7
  GND Layer w10: X4.19 2119.27,4516.77 2110.62,4508.12 2072.62,4508.12 2064.92,4500.42 X4.6 2064.92,4404.82 2120.62,4349.12 X7.16
f_0: R14.1 R14.2 X7.15 X28.1 | length 4481.2
  Digital Layer w10: R14.2 1191.62,208.12 1225.62,242.12 1225.62,306.12 R14.1 1186.62,349.12 X28.1 1186.62,622.12 1699.62,1135.12 1699.62,1960.12 2067.62,2328.12 2067.62,3141.12 2121.62,3195.12 X7.15@2121.62,4206.12
g: R1.3 X2.15 X3.2 | length 505.6
  Digital Layer w10: R1.3 3175.62,3899.12 X3.2
  GND Layer w10: X2.15 R1.3
g_00: X4.13 X7.32 | length 211.5
  GND Layer w10: X4.13 2870.54,4452.2 2920.62,4402.12 X7.32
g_0: R1.1 R1.2 X3.1 X7.31 | length 871.2
  Digital Layer w10: X7.31 3205.62,4206.12 3275.62,4136.12 X3.1 3275.62,3885.12 R1.1 3318.62,3784.12 3276.62,3742.12 R1.2
GND: X1.6 X1.11 X1.12 X2.12 X4.26 X4.27 X8.12 X9.12 X14.12 X15.12 X20.4 X20.5 X20.6 X21.2 X22.12 X23.12 X30.1 X30.2 X31.1 X31.2 X34.4 X34.29 X35.1 X35.2 X36.2 X36.10 X36.11 X39.1 X39.2 X40.4 X43.1 X43.2
h: R3.3 X2.10 X6.2 | length 507.6
  Digital Layer w10: R3.3 3175.62,3399.12 X6.2
  GND Layer w10: X2.10 R3.3
h_00: X4.25 X7.30 | length 278.2
  GND Layer w10: X4.25 2771.48,4399.26 2820.62,4350.12 X7.30
h_0: R3.1 R3.2 X6.1 X7.29 | length 1255
  Digital Layer w10: X7.29 2820.62,4060.12 3275.62,3605.12 X6.1 3275.62,3385.12 R3.1 3318.62,3268.12 3292.62,3242.12 R3.2
j: R5.3 X9.15 X11.2 | length 509.6
  Digital Layer w10: R5.3 3175.62,2888.87 X11.2
  GND Layer w10: X9.15 R5.3
j_00: X4.12 X7.28 | length 147.5
  GND Layer w10: X4.12 2717.13,4382.61 2720.62,4379.12 X7.28
j_0: R5.1 R5.2 X7.27 X11.1 | length 1798.4
  Digital Layer w10: X7.27 2720.62,4060.12 2960.62,3820.12 2960.62,3333.12 3275.62,3018.12 X11.1 3275.62,2874.87 R5.1 3318.62,2772.12 3278.37,2731.87 R5.2
k: R7.3 X9.10 X13.2 | length 512.6
  Digital Layer w10: X9.10 R7.3 3175.62,2388.87 X13.2
k_00: X4.11 X4.24 X7.26 | length 303
  GND Layer w10: X7.26 2620.62,4373.12 2608.43,4385.31 X4.11 2608.43,4494.92 2621.62,4508.12 2651.62,4508.12 2662.78,4519.27 X4.24
k_0: R7.1 R7.2 X7.25 X13.1 | length 2339.2
  Digital Layer w10: X7.25 2620.62,3212.12 3275.62,2557.12 X13.1 3275.62,2374.87 R7.1 3318.62,2273.12 3277.37,2231.87 R7.2
l: R9.3 X15.15 X17.2 | length 500.6
  Digital Layer w10: X15.15 R9.3 3175.62,1878.87 X17.2
l_00: X4.10 X4.23 X7.24 | length 307.2
  GND Layer w10: X7.24 2520.62,4364.12 2499.72,4385.02 X4.10 2499.72,4494.22 2513.62,4508.12 2544.62,4508.12 2554.07,4517.57 X4.23
l_0: R9.1 R9.2 X7.23 X17.1 | length 3167.1
  Digital Layer w10: X7.23 2520.62,2334.12 2744.62,2110.12 3211.62,2110.12 3275.62,2046.12 X17.1 3275.62,1864.87 R9.1 3316.62,1819.87 3316.62,1756.12 3282.37,1721.87 R9.2
m: R11.3 X15.10 X19.2 | length 512.9
  Digital Layer w10: X15.10 R11.3@3118,1321.87 ; R11.3@3118,1322.49 R11.3@3118.62,1323.12 ; R11.3 3175.62,1379.12 X19.2
m_00: X4.9 X4.22 X7.22 | length 311.4
  GND Layer w10: X7.22 2420.62,4362.12 2391.02,4391.72 X4.9 2391.02,4496.52 2402.62,4508.12 2434.62,4508.12 2445.37,4518.87 X4.22
m_0: R11.1 R11.2 X7.21 X19.1 | length 3716.6
  Digital Layer w10: X7.21 2420.62,1877.12 2726.62,1571.12 3214.62,1571.12 3275.62,1510.12 X19.1 3275.62,1365.12 R11.1 3318.62,1265.12 3275.62,1222.12 R11.2
MO: X1.10 X1.14 X2.9 X2.14 X8.9 X8.14 X9.9 X9.14 X14.9 X14.14 X15.9 X15.14 X22.9 X22.14 X23.9 X23.14
n: R13.3 X23.15 X25.2 | length 501.6
  Digital Layer w10: X23.15 R13.3@3118.62,806.87 ; R13.3 3175.62,862.87 X25.2
n_00: X4.8 X4.21 X7.20 | length 316.2
  GND Layer w10: X7.20 2320.62,4352.12 2282.32,4390.42 X4.8 2282.32,4491.82 2295.62,4505.12 2329.62,4505.12 2336.67,4512.17 X4.21
n_0: R13.1 R13.2 X7.19 X25.1 | length 4278.3
  Digital Layer w10: X7.19 2320.62,1908.12 2640.62,1588.12 2640.62,1151.12 2721.62,1070.12 3207.62,1070.12 3275.62,1002.12 X25.1 3275.62,848.87 R13.1 3318.62,740.12 3284.37,705.87 R13.2
p: R15.3 X23.10 X29.2 | length 499.4
  Digital Layer w10: X23.10@2753.25,307.49 R15.3@3118,307.49
  GND Layer w10: R15.3 3175.62,365.12 X29.2
p_00: X4.7 X4.20 X7.18 | length 318.6
  GND Layer w10: X7.18 2220.62,4353.12 2173.62,4400.12 2173.62,4497.12 2184.62,4508.12 2216.62,4508.12 2227.97,4519.47 X4.20
p_0: R15.1 R15.2 X7.17 X29.1 | length 4839.3
  Digital Layer w10: X7.17 2220.62,3203.12 2286.62,3137.12 2286.62,1874.12 2596.62,1564.12 2596.62,730.12 2668.18,658.56 3185.18,658.56 3275.62,568.12 X29.1
  GND Layer w10: R15.2 3290.62,208.12 3318.62,236.12 R15.1 3275.62,351.12 X29.1
V_LED: X1.4 X1.9 X20.2 | length 2084.1
  nMO Layer w20: X20.2 73,3559.27 73,3342 171.77,3243.23 X1.9 919.73,3243.23 1318.73,3642.23 X1.4
V_MB: X1.13 X2.13 X8.13 X9.13 X14.13 X15.13 X20.1 X22.13 X23.13 X44.1 | length 10519.9
  MO Layer w20: X20.1 301.68,3954 460,3954 538,3876 538,3686 580.77,3643.23 X1.13 ; X22.13 770.62,715.12 770.62,1514.12 X14.13 764.62,1724.12 764.62,2530.12 X8.13 770.62,2740.12 770.62,3535.59 X1.13 ; X44.1 2305.87,2258.12 2679.62,2631.87 X9.13 ; X23.13 2640.62,718.87 2640.62,1509.87 X15.13 2629.62,1744.87 2629.62,2509.87 X9.13 ; X1.13 1089.87,4070.12 2323.62,4070.12 X2.13 2625.62,3516.12 2625.62,2757.87 X9.13
V_MB_ruler: X36.7 X44.2 | length 4657.8
  MO Layer w20: X36.7 237.02,872.52 209.62,845.12 209.62,347.12 301.62,255.12 465.62,255.12 679.62,41.12 1609.62,41.12 1728.62,160.12 1728.62,1994.12 1992.62,2258.12 X44.2
V_RESERVE: X20.3 X21.1 | length 1067.3
  GND Layer w20: X20.3 79,3608.83 79,4170 210.12,4301.12 X21.1
pads on no net: X1.1 X1.2 X1.3 X2.1 X2.2 X2.3 X2.4 X2.5 X2.6 X8.1 X8.2 X8.3 X8.4 X8.5 X8.6 X9.1 X9.2 X9.3 X9.4 X9.5 X9.6 X14.1 X14.2 X14.3 X14.4 X14.5 X14.6 X15.1 X15.2 X15.3 X15.4 X15.5 X15.6 X22.1 X22.2 X22.3 X22.4 X22.5 X22.6 X23.1 X23.2 X23.3 X23.4 X23.5 X23.6 X26.3 X26.4 X34.1 X34.2 X34.3 X34.9 X34.17 X34.18 X34.25 X34.26 X34.27 X34.28 X34.30 X36.1 X36.3 X36.4 X36.5 X36.9 X40.1 X40.5 X40.6 X40.7 X40.8

## Polygon pours and split planes (outlines as drawn)
MO on MO Layer "NONET_L02_P-001" (hatched 90Degree grid 20 track 8, remove dead copper, pour order 2): 78.74,4803.15 4055.12,4803.15 4055.12,78.74 78.74,78.74
\M\O\ on nMO Layer "NONET_L02_P-001" (hatched 90Degree grid 20 track 8, remove dead copper, pour order 6): 78.74,4803.15 4055.12,4803.15 4055.12,78.74 78.74,78.74
GND on GND Layer "NONET_L02_P-001" (hatched 90Degree grid 20 track 8, remove dead copper, pour order 4): 78.74,4803.15 4055.12,4803.15 4055.12,78.74 78.74,78.74

## Other copper
Digital Layer:
  pour cut-out: 4133.86,4881.89 3897.64,4881.89 3897.64,4645.67 4133.86,4645.67
  pour cut-out: 0,4881.89 236.22,4881.89 236.22,4645.67 0,4645.67
  pour cut-out: 0,0 0,236.22 236.22,236.22 236.22,0
  pour cut-out: 4133.86,0 4133.86,236.22 3897.64,236.22 3897.64,0
nMO Layer:
  pour cut-out: 0,236.22 236.22,236.22 236.22,0 0,0
  pour cut-out: 3897.64,236.22 4133.86,236.22 4133.86,0 3897.64,0
  pour cut-out: 4133.86,4881.89 3897.64,4881.89 3897.64,4645.67 4133.86,4645.67
  pour cut-out: 0,4881.89 236.22,4881.89 236.22,4645.67 0,4645.67
MO Layer:
  pour cut-out: 0,236.22 236.22,236.22 236.22,0 0,0
  pour cut-out: 3897.64,236.22 4133.86,236.22 4133.86,0 3897.64,0
  pour cut-out: 3897.64,4881.89 4133.86,4881.89 4133.86,4645.67 3897.64,4645.67
  pour cut-out: 0,4881.89 236.22,4881.89 236.22,4645.67 0,4645.67
GND Layer:
  pour cut-out: 0,236.22 236.22,236.22 236.22,0 0,0
  pour cut-out: 0,4881.89 236.22,4881.89 236.22,4645.67 0,4645.67
  pour cut-out: 3897.64,4881.89 4133.86,4881.89 4133.86,4645.67 3897.64,4645.67
  pour cut-out: 3897.64,236.22 4133.86,236.22 4133.86,0 3897.64,0

## Silkscreen, mask and mechanical layers (free items; w line width, h text height)
Top Overlay:
  drawing of 42 lines, arcs and shapes, not listed
  text "To LED" at 3307.09,4409.45 h60 r90
  text "GND" at 601,4251 h40 r90
  text "15" at 3400.62,4246.12 h60
  text "+" at 3752.62,4245.12 h60
  text "2" at 3812.62,4245.12 h60
  text "V/G" at 1350.62,4178.12 h60 r90
  text "V_RESERVE" at 302,4126 h40 r90
  text "dp" at 1466.62,4079.12 h60
  text "a" at 1596.62,4079.12 h60
  text "b" at 1701.62,4079.12 h60
  text "c" at 1798.66,4079.12 h60
  text "d" at 1898.66,4079.12 h60
  text "e" at 2002.66,4079.12 h60
  text "f" at 2111.62,4079.12 h60
  text "p" at 2200.62,4079.12 h60
  text "n" at 2299.62,4079.12 h60
  text "m" at 2400.62,4079.12 h60
  text "L" at 2503.62,4079.12 h60
  text "j" at 2700.62,4079.12 h60
  text "h" at 2800.62,4079.12 h60
  text "g" at 2900.62,4079.12 h60
  text "k" at 2600.62,4078.12 h60
  text "LEDS + rulers /  controller" at 1802,3818 h60
  text "g" at 3389.62,3771.12 h60
  text "dp" at 1294.62,3766.49 h60
  text "OPTO" at 2065.62,3692.12 h60
  text "MSPat" at 2047.62,3588.12 h60
  text "h" at 3390.62,3253.12 h60
  text "LED" at 2101.62,3149.12 h60
  text "a" at 1298.62,2761.12 h60
  text "j" at 3390.62,2753.12 h60
  text "Optical /  Ruler" at 1986.62,2568.12 h60
  text "Amp / on/off" at 208,2504 h60
  text "k" at 3388.62,2253.12 h60
  text "b" at 1300.62,2248.12 h60
  text "Digital /  Ruler" at 1986.62,1994.12 h60
  text "Digital Ruler" at 531,1747 h60 r90
  text "c" at 1298.62,1747.12 h60
  text "L" at 3387.62,1733.12 h60
  text "d" at 1299.62,1241.12 h60
  text "m" at 3390.62,1235.12 h60
  text "e" at 1300.62,734.12 h60
  text "n" at 3388.62,732.12 h60
  text "Optical Ruler" at 567.62,558.12 h60 r90
  text "p" at 3387.62,232.12 h60
  text "f" at 1302.62,222.12 h60
Bottom Overlay:
  text "g" at 2644.62,3825.12 h60
  text "d / p" at 565.98,3754.23 h60
  text "nMO" at 1884,3403 h60
  text "2" at 1755,3318 h60
  text "h" at 2644.62,3316.12 h60
  text "A1" at 3870.63,3307.12 h60
  text "MO" at 565.98,3305 h60
  text "3" at 1755,3213 h60
  text "4" at 3830.64,3209.12 h60
  text "a" at 555.62,2812.12 h60
  text "j" at 2644.62,2807.87 h60
  text "k" at 2644.62,2311.87 h60
  text "b" at 555.62,2310.12 h60
  text "10" at 1804.61,2301.12 h60
  text "A5" at 3890.62,2298.12 h60
  text "9" at 1754.62,2201.12 h60
  text "A4" at 3890.62,2200.12 h60
  text "c" at 555.62,1803.12 h60
  text "L" at 2645.62,1798.87 h60
  text "d" at 555.62,1300.12 h60
  text "m" at 2645.62,1296.87 h60
  text "5" at 1754.62,1292.12 h60
  text "A3" at 3890.62,1289.12 h60
  text "8" at 1754.62,1193.12 h60
  text "A2" at 3890.62,1191.12 h60
  text "e" at 555.62,788.12 h60
  text "n" at 2645.62,786.87 h60
  text "p" at 2645.62,287.87 h60
  text "f" at 555.62,277.12 h60
  text "11" at 1784.61,276.12 h60
  text "A0" at 3890.62,275.12 h60
  text "12" at 1804.61,176.12 h60
  text "13" at 3880.63,175.12 h60
Mechanical 1:
  circle w10: c118.11,118.11 r78.74
  circle w10: c4015.75,118.11 r78.74
  circle w10: c4015.75,4763.78 r78.74
  circle w10: c118.11,4763.78 r78.74
  lines w10: 0,0 0,4881.89 4133.86,4881.89 4133.86,0 0,0